# EAGLE board source_eagle (EAGLE 9.6.2)
REV: A
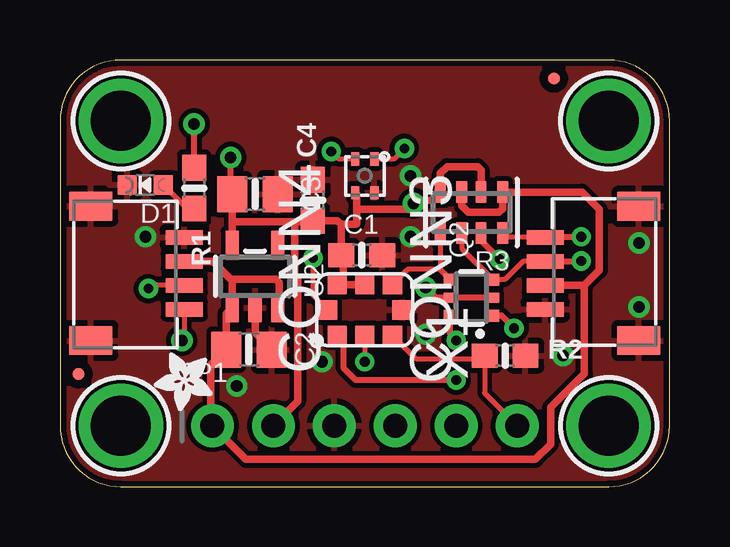
[diagram p0: board, top side]
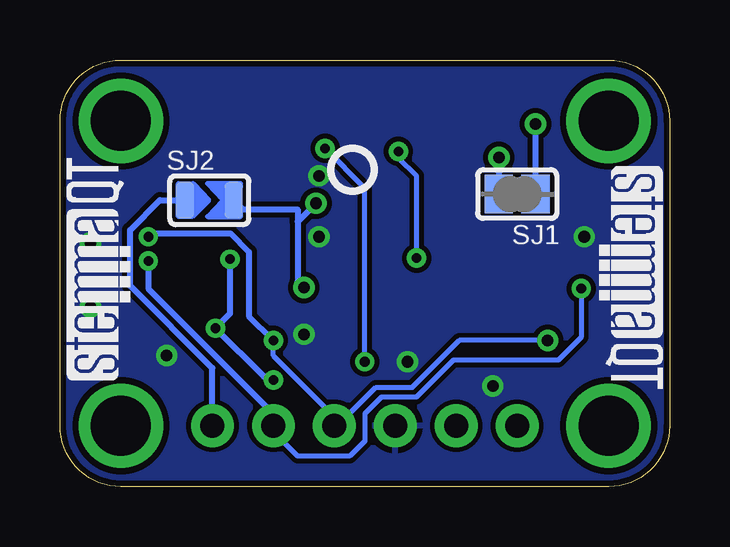
[diagram p1: board, bottom side, seen from below]

Size 25.4 x 17.78 mm. Coordinates in mm from the lower left corner, seen from the top.
Outline: 0,15.24 0,2.54 arc90 2.54,0 22.86,0 arc90 25.4,2.54 25.4,15.24 arc90 22.86,17.78 2.54,17.78 arc90 0,15.24
Copper layers (1*16): Top 0.035mm / dielectric 1.5mm / Bottom 0.035mm
Design rules "adafruit *": minimum track width 8mil, minimum drill 15.5mil, track to track 8mil, track to pad 8mil, pad to pad 8mil, via to via 8mil, smd to smd 8mil, copper to edge 10mil, drill to drill 8mil, minimum pad ring 10mil, minimum via ring 8mil, stop-mask expansion 2mil, vias tented up to drill 20mil, thermal gap 10mil
Net classes: 1 highpower: width 0.305 mm, drill 0.483 mm; 2 lowpower: width 0.254 mm, drill 0.483 mm

## Footprints (pad centres in the part's own frame; a part is rotated, then mirrored left to right if it is on the bottom)
0603-NO = smd 1.075 x 1: 1 -0.85,0; 2 0.85,0
0805-NO = smd 1.24 x 1.5: 1 -0.95,0; 2 0.95,0
JST_SH4 = smd 0.6 x 1.55: 1 -1.5,2.006; 2 -0.5,2.006; 3 0.5,2.006; 4 1.5,2.006 | smd 1.2 x 1.8: MT1 -2.8,-1.894; MT2 2.8,-1.894
CHIPLED_0603_NOOUTLINE = smd 0.8 x 0.8: A 0,-0.75; C 0,0.75
FIDUCIAL_0.5MM = smd 0.5 x 0.5: 1 0,0
1X06_ROUND_70 = drill 1 pad 1.778: 1 -6.35,0; 2 -3.81,0; 3 -1.27,0; 4 1.27,0; 5 3.81,0; 6 6.35,0
SOT363 = smd 0.5 x 0.5: 1 -0.75,-0.9; 3 0.75,-0.9; 4 0.75,0.9; 6 -0.75,0.9 | smd 0.4 x 0.5: 2 0,-0.9; 5 0,0.9
RESPACK_4X0603 = smd 0.45 x 0.9: 1 -1.3,-0.85; 2 -0.4,-0.85; 3 0.4,-0.85; 4 1.3,-0.85; 5 1.3,0.85; 6 0.4,0.85; 7 -0.4,0.85; 8 -1.3,0.85
SOLDERJUMPER_CLOSEDWIRE = smd 1.168 x 1.6: 1 -0.762,0; 2 0.762,0 | smd 0.635 x 0.203: WIRE 0,0
SOLDERJUMPER_ARROW_NOPASTE = smd 0.762 x 1.524: 1 -1.016,0; 2 1.016,0
SOT23-5 = smd 0.55 x 1.2: 1 -0.95,-1.3; 2 0,-1.3; 3 0.95,-1.3; 4 0.95,1.3; 5 -0.95,1.3
MOUNTINGHOLE_2.5_PLATED = drill 2.5 pad 3.2: P$1 0,0
STCC4 = smd 0.8 x 0.8: 1 -1.05,1.15; 2 -1.05,0; 3 -1.05,-1.15; 4 0,-1.55; 5 1.05,-1.15; 6 1.05,0; 7 1.05,1.15; 8 0,1.55
SHT4X = smd 0.55 x 0.35: 1 -0.7,0.4; 2 -0.7,-0.4; 3 0.7,-0.4; 4 0.7,0.4

## Placement (x,y rotation side)
C1  0.1uF  [0603-NO]  12.57,9.65 0 top
C2  10uF  [0805-NO]  7.87,5.71 0 top
C3  10uF  [0805-NO]  8.13,12.19 0 top
C4  0.1uF  [0603-NO]  10.54,11.94 90 top
CONN3  STEMMA_I2C_QT  [JST_SH4]  22.23,8.89 90 top
CONN4  STEMMA_I2C_QT  [JST_SH4]  3.17,8.89 270 top
D1  GREEN  [CHIPLED_0603_NOOUTLINE]  3.56,12.57 90 top
FID3  FIDUCIAL_0.5MM  [FIDUCIAL_0.5MM]  0.76,4.7 0 top
FID4  FIDUCIAL_0.5MM  [FIDUCIAL_0.5MM]  20.57,17.02 0 top
JP1  [1X06_ROUND_70]  12.7,2.54 0 top
PLABEL0  [PLABEL0]  6.35,0.89 0 top
PLABEL1  [PLABEL1]  8.89,4.19 0 top
PLABEL2  [PLABEL2]  11.43,0.89 0 top
PLABEL3  [PLABEL3]  13.97,4.19 0 top
PLABEL4  [PLABEL4]  16.64,0.89 0 top
PLABEL5  [PLABEL5]  19.05,4.19 0 top
PLABEL6  [PLABEL6]  12.7,16.76 0 top
PLABEL7  [PLABEL7]  12.7,15.11 0 top
PLABEL8  [PLABEL8]  0.38,12.45 0 top
PLABEL9  [PLABEL9]  12.7,0.89 0 bottom
PLABEL10  [PLABEL10]  6.48,13.97 0 bottom
PLABEL11  [PLABEL11]  19.18,13.84 0 bottom
PLABEL12  [PLABEL12]  12.83,16.13 0 bottom
PLABEL13  [PLABEL13]  12.7,7.11 0 bottom
Q2  BSS138  [SOT363]  17.14,7.87 90 top
R1  10K  [0603-NO]  5.59,12.45 270 top
R2  10K  [0603-NO]  18.54,5.46 0 top
R3  10K Pack  [RESPACK_4X0603]  17.14,11.43 180 top
SJ1  [SOLDERJUMPER_CLOSEDWIRE]  6.35,12.19 180 bottom
SJ2  [SOLDERJUMPER_ARROW_NOPASTE]  19.18,11.94 0 bottom
U2  AP2127K-3.3  [SOT23-5]  8.13,8.76 0 top
U$1  MOUNTINGHOLE2.5  [MOUNTINGHOLE_2.5_PLATED]  2.54,15.24 0 top
U$17  MOUNTINGHOLE2.5  [MOUNTINGHOLE_2.5_PLATED]  22.86,15.24 0 top
U$19  MOUNTINGHOLE2.5  [MOUNTINGHOLE_2.5_PLATED]  2.54,2.54 0 top
U$21  MOUNTINGHOLE2.5  [MOUNTINGHOLE_2.5_PLATED]  22.86,2.54 0 top
U$25  [PCBFEAT-REV-040]  13.21,13.21 0 bottom
U$28  [ADAFRUIT_2.5MM]  6.35,5.59 180 top
U$30  [STEMMAQT]  22.48,4.45 90 bottom
U$31  [STEMMAQT]  2.92,13.34 270 bottom
X1  STCC-4  [STCC4]  12.7,7.37 90 top
X2  SHT41  [SHT4X]  12.7,12.95 270 top

## Library data of the parts
C1-C4 FID3 FID4 JP1 R1-R3 SJ1 U$25 U$28 = microbuilder
CONN3 CONN4 = adafruit_electromech; LCSC: C2845363
D1 = microbuilder; ROT: 270
PLABEL0 PLABEL1-PLABEL13 = pinguin
Q2 = microbuilder; JLC_ROTATION: 270
SJ2 = microbuilder; BOM: EXCLUDE
U2 = adafruit_power; JLC_ROTATION: 270
U$1 U$17 U$19 U$21 = adafruit_electromech; BOM: EXCLUDE
U$30 U$31 = silks
X1 X2 = adafruit_sensor

## Nets
3.3V [lowpower]: C1.1 C3.1 C4.1 JP1.2 Q2.2 Q2.5 R3.2 R3.4 SJ1.2 SJ2.2 U2.5 X1.6 X1.7 X2.3
ADDR: JP1.6 R2.1 SJ2.1 X1.3
GND [highpower]: C1.2 C2.2 C3.2 C4.2 CONN3.1 CONN3.MT1 CONN3.MT2 CONN4.1 CONN4.MT1 CONN4.MT2 D1.C JP1.3 R2.2 U2.2 X1.4 X2.4
N$1: D1.A R1.2
N$2 [lowpower]: R1.1 SJ1.1
N$3: X1.8 X2.2
N$4: X1.2 X2.1
SCL: CONN3.4 CONN4.4 JP1.4 Q2.6 R3.8
SCL_3V: Q2.1 R3.7 X1.1
SDA: CONN3.3 CONN4.3 JP1.5 Q2.3 R3.6
SDA_3V: Q2.4 R3.5 X1.5
VCC [highpower]: C2.1 CONN3.2 CONN4.2 JP1.1 R3.1 R3.3 U2.1 U2.3

## Tracks (layer width: path | path; a pad name or v marks a point on that pad's centre or on a via)
3.3V  (via drill 0.48)
  Top 0.254: Q2.2 Q2.5 15.67,7.87 v15.24,8.3 | C3.1 7.11,12.26 v7.11,13.72 | 14.73,11.94 v14.73,11.81
  Top 0.305: X1.6 11.77,8.42 11.55,8.64 X1.7 11.8,8.67 11.8,9.57 C1.1 11.72,10.92 11.71,10.93 | X2.3 12.36,12.2 12.36,11.56 | 12.36,11.56 12.36,10.96 12.33,10.93 11.71,10.93 | C3.1 7.18,11.05 | 7.18,11.05 U2.5 | 7.18,11.05 9.78,11.05 | v14.73,11.81 14.48,11.56 12.36,11.56 | 14.73,11.94 15.5,11.94 R3.4 15.85,13.05 16.13,13.34 17.4,13.34 17.55,13.19 R3.2 | 9.78,11.05 9.78,8.76 9.91,8.64 9.91,3.56 JP1.2 | 11.71,10.93 11.56,11.09 C4.1 10.5,11.05 9.78,11.05
  Bottom 0.254: v7.11,13.72 SJ1.2 | v14.73,11.81 15.49,11.05 | v15.24,8.3 15.49,8.56 15.49,11.05 | SJ2.2 17.78,11.56 15.49,11.56 15.49,11.05
ADDR
  Top 0.203: X1.3 14.83,5.33 17.57,5.33 R2.1 17.69,3.9 JP1.6
  Bottom 0.254: JP1.6 19.05,4.94 22.48,8.37 22.48,10.69 21.23,11.94 SJ2.1
GND  (via drill 0.48)
  Top 0.305: U2.2 8.13,6.41 C2.2
  other vias: 3.56,10.41 15.24,6.35 14.61,10.41 14.61,12.95 24.13,7.49 24.13,10.16 20.95,5.46 10.92,5.21 7.37,4.19
  pour Top: 0,17.78 25.4,17.78 25.4,0 0,0
  pour Bottom: 0,17.78 25.4,17.78 25.4,0 0,0
N$1
  Top 0.203: D1.A 5.28,11.6 R1.2
N$2  (via drill 0.48)
  Top 0.254: R1.1 v5.59,15.11
  Bottom 0.254: v5.59,15.11 SJ1.1
N$3  (via drill 0.4)
  Top 0.203: v10.54,9.53 10.54,7.97 X1.8 | X2.2 11.62,13.65 v11.3,13.97
  Bottom 0.203: v10.54,9.53 10.54,12.95 11.3,13.72 v11.3,13.97
N$4  (via drill 0.4)
  Top 0.203: X1.2 v12.7,5.21 | v14.35,14.1 13.91,13.65 X2.1
  Bottom 0.203: v12.7,5.21 12.7,12.45 v14.35,14.1
SCL  (via drill 0.4, 0.48)
  Top 0.203: CONN3.4 19.94,10.39 18.64,10.39 R3.8 | CONN4.4 5.18,6.2 v5.08,6.1
  Top 0.254: Q2.6 16.25,6.36 v16.51,6.1 | v21.72,10.41 21.7,10.39 19.94,10.39
  Bottom 0.203: v5.08,6.1 8.76,6.1 10.72,4.14 12.24,4.14 13.84,2.54 JP1.4 13.97,2.92 16.51,5.46 v16.51,6.1
  Bottom 0.254: v16.51,6.1 17.53,7.11 17.53,9.78 18.29,10.54 21.59,10.54 v21.72,10.41
SCL_3V  (via drill 0.4)
  Top 0.254: v16.51,4.45 12.32,4.45 11.8,4.96 11.8,6.06 X1.1 | v18.92,6.6 18.4,7.12 Q2.1 | R3.7 17.55,10.25 v18.32,9.48
  Bottom 0.254: v16.51,4.45 16.64,4.57 16.89,4.57 v18.92,6.6 18.32,7.21 v18.32,9.48
SDA  (via drill 0.4)
  Top 0.203: R3.6 16.75,9.92 Q2.3 18.53,8.62 19.3,9.39 CONN3.3 | CONN4.3 3.82,8.39 v3.68,8.26
  Top 0.254: CONN3.3 20.23,9.4 v21.72,9.4
  Bottom 0.203: v3.68,8.26 3.68,6.22 4.64,5.27 9.01,5.27 10.55,3.73 12.01,3.73 12.7,3.05 12.7,1.91 13.34,1.27 15.49,1.27 16.51,2.29 JP1.5
  Bottom 0.254: v21.72,9.4 21.72,8.26 16.51,3.05 JP1.5
SDA_3V
  Top 0.203: X1.5 14.48,9.05 15.82,9.05 Q2.4 16.25,8.66 15.85,9.06 R3.5
VCC
  Top 0.305: 7.18,8.57 U2.1 6.92,7.21 C2.1 6.29,5.08 6.29,2.6 JP1.1 7.75,1.14 19.81,1.14 20.45,1.78 20.45,3.3 21.84,4.7 21.84,8.27 21.79,8.33 | 7.18,8.57 7.24,8.64 9.02,8.64 9.14,8.51 9.14,7.53 U2.3 | CONN4.2 6.36,9.39 7.18,8.57 | R3.3 16.75,11.7 17.02,11.43 18.29,11.43 18.45,11.59 R3.1 21.76,12.28 22.48,11.56 22.48,9.02 21.79,8.33 | CONN3.2 21.73,8.39 21.79,8.33

## Text on the board
Pinguin_tBackup: STCC4+SHT41 | CO2+Temp+Humidity | on | 3Vo | SCL | ADDR | VIN | GND | SDA
Pinguin_bBackup: STCC4+SHT41 | LED | Addr | 400~5000ppm CO2 / 0 to +70°C @ ±0.2°C / 10 to 90%RH @ ±1.8% / Default I2C addr 0x64 | VLogic/Vcc: 3-5VDC